# Altium PCB CP2105.PcbDoc
Units mil, origin at the board's own origin, x right, y up, seen from the top; angles counter-clockwise.
Board outline 990 x 600 mil, 2 copper layers (Top Layer, Bottom Layer), stack 65.792 mil thick; 17 components, 27 nets, 91 pads, 31 vias.
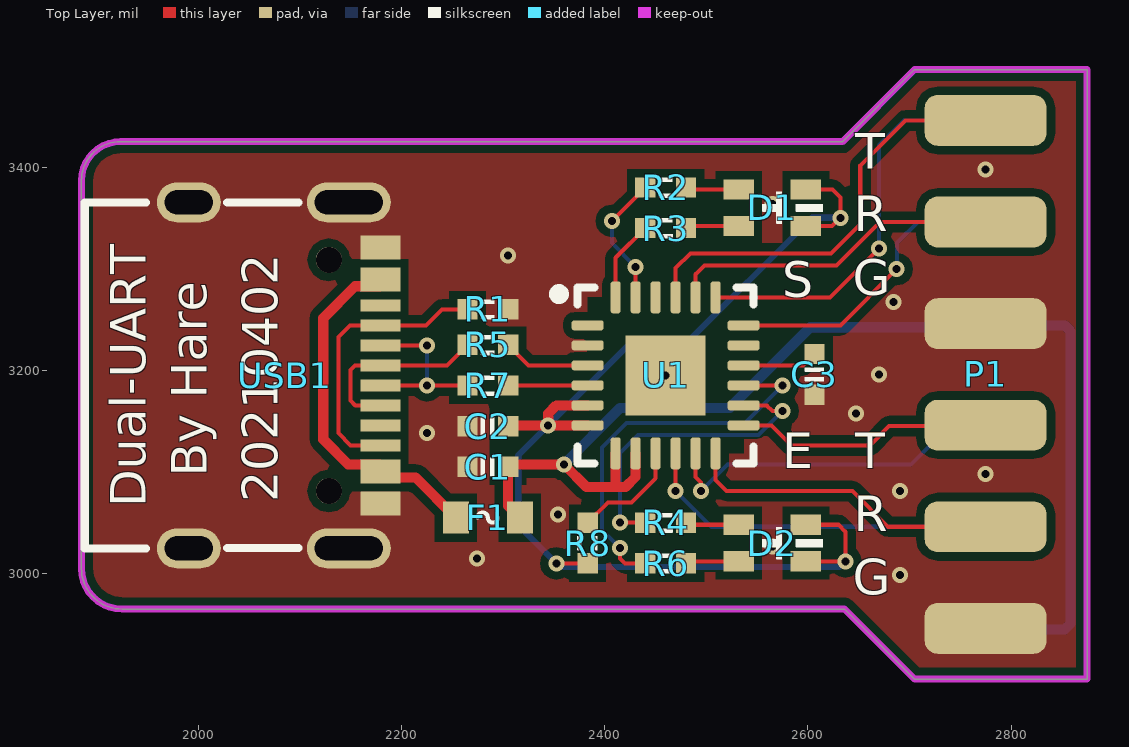
[diagram p0: Top Layer view]
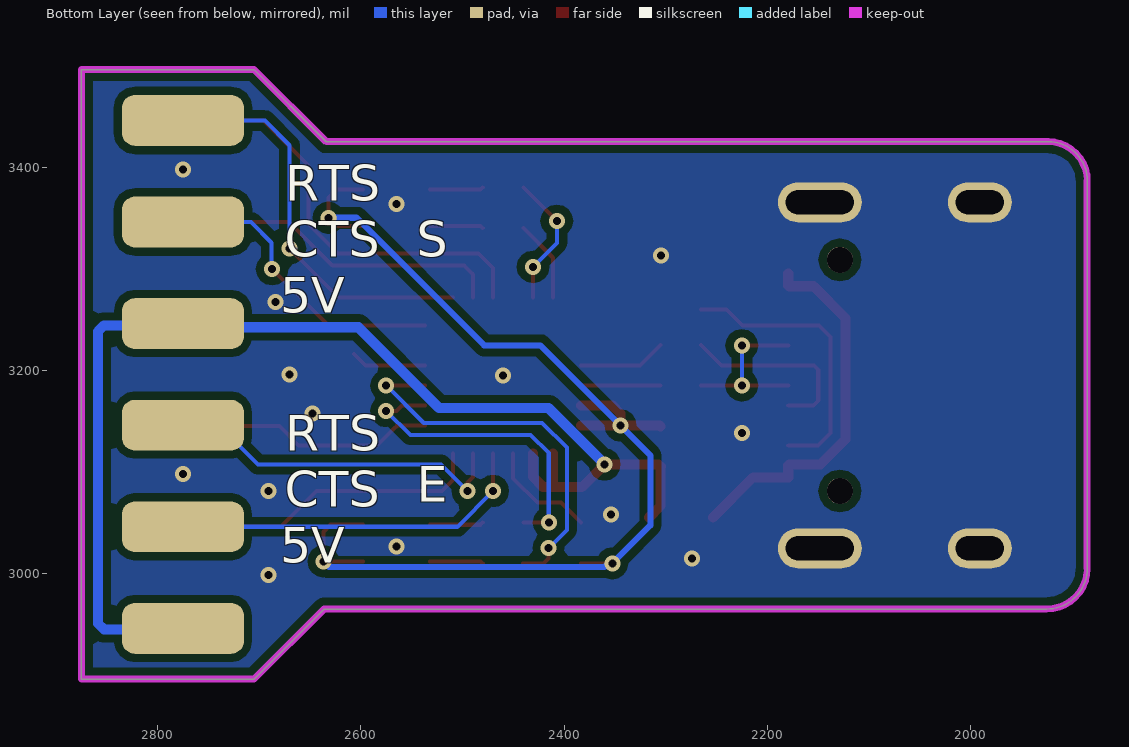
[diagram p1: Bottom Layer view, seen from below]

## Layer stack, top to bottom
Top Solder: solder mask 0.4, Solder Resist, Dk 3.5
Top Layer: signal copper 1.4
Dielectric 1: dielectric 62.9921, FR-4, Dk 4.8
Bottom Layer: signal copper 1.4
Bottom Solder: solder mask 0.4, Solder Resist, Dk 3.5

## Board outline
1925,2965 cw(c1925,3005) 1885,3005 1885,3386.65 cw(c1923.35,3386.65) 1923.35,3425 2634,3425 2705,3496 2875,3496 2875,2896 2705,2896 2636,2965

## Design rules (kind name [scope] priority, off if disabled: settings)
Clearance [All] p1: gap=7.87 ignorepadtopadclearanceinfootprint=TRUE
ComponentClearance [All] p1: gap=0 collisioncheckmode=3 verticalgap=0 showdistances=FALSE
DiffPairsRouting [All] p1: maxlimit=10 minlimit=10 mostfreqgap=10 toplayer_minwidth=7.87 toplayer_maxwidth=15 toplayer_prefwidth=7.87 bottomlayer_minwidth=7.87 bottomlayer_maxwidth=15 bottomlayer_prefwidth=7.87 maxuncoupledlength=500
MatchedLengths SD_CARD_MatchedLengths [InNetClass('SD_CARD')] p1: tolerance=400 checknetsindiffpair=FALSE checkdiffpairvsdiffpair=TRUE checkxsignals=TRUE checkothers=TRUE
PolygonConnect PolygonConnect_wifi [HasFootprint('RTL8723DU_MOUDLE')] p1: connectstyle=Relief reliefconductorwidth=10 reliefentries=4 polygonreliefangle="90 Angle" airgapwidth=10
PolygonConnect PolygonConnect_Res [HasFootprint('RES_0603')] p2: connectstyle=Relief reliefconductorwidth=10 reliefentries=4 polygonreliefangle="90 Angle" airgapwidth=10
PolygonConnect PolygonConnect_Core [HasFootprint('CORE-82PIN-SMD')] p3: connectstyle=Relief reliefconductorwidth=10 reliefentries=4 polygonreliefangle="90 Angle" airgapwidth=10
PolygonConnect [All] p4: connectstyle=Direct reliefconductorwidth=10 reliefentries=4 polygonreliefangle="90 Angle" airgapwidth=10
RoutingVias [All] p1: holewidth=28 width=50 viastyle="Through Hole" minholewidth=7.87 minwidth=15.75 maxholewidth=28 maxwidth=50
SolderMaskExpansion [All] p1: expansion=4
Width Width_PWR [InNetClass('PWR')] p1: maxlimit=23.62 minlimit=7.87 preferedwidth=10
Width [All] p2: maxlimit=23.62 minlimit=4 preferedwidth=8
28 further rules are at their usual default settings.

## Components (designator, comment, footprint, x,y, rotation, side; value= is the part's Value field where it differs from the comment)
C1 "4.7uF" CAP_0402 2285,3105 r180 top
C2 "4.7uF" CAP_0402 2285,3145 r180 top
C3 "4.7uF" CAP_0402 2606.5,3196 r270 top
D1 "=Value" LED_1616 2565,3360 r180 top
D2 "=Value" LED_1616 2565,3030 r180 top
F1 "MF-FSMF050X-2" FUSE_0603 2285,3055 r0 top
P1 "DIP 2x6" HDR2X6_2.54_180H 2775,3446 r0 top
R1 "5.1K" RES_0402 2285,3260 r180 top
R2 "4.7K" RES_0402 2460,3380 r0 top
R3 "1K" RES_0402 2460,3340 r0 top
R4 "4.7K" RES_0402 2460,3050 r0 top
R5 "22R" RES_0402 2285,3225 r180 top
R6 "1K" RES_0402 2460,3010 r0 top
R7 "22R" RES_0402 2285,3185 r180 top
R8 "10K" RES_0402 2383.23,3030 r90 top
U1 "CP2105" QFN-24-4.0X4.0-P0.5 2460,3195 r270 top
USB1 "Type-C" USB-Type-C 2085,3195 r180 top

## Footprints (in the part's own frame and the unit in brackets; to place one, negate y for a bottom-side part, rotate by r counter-clockwise, add the part's x,y. Pads: shape width x height; smd on the part's side, far side on the other; paste and mask are expansions set on the pad)
CAP_0402 [mil]
  rect 20x20 smd: 1(-20,0) 2(20,0)
  silkscreen extent -7,-9 7,9, body extent -20,-10 20,10, height 20
FUSE_0603 [mm]
  rect 0.65x0.8 smd: 1(-0.8,0) 2(0.8,0)
  silkscreen extent -0.25,-0.13 0.25,0.13, body extent -0.8,-0.4 0.8,0.4, height 0.45
HDR2X6_2.54_180H [mil]
  rrect50% 120x50 smd: 1(0,0) 3(0,-100) 5(0,-200) 7(0,-300) 9(0,-400) 11(0,-500)
  rrect50% 120x50 smd far side: 2(0,0) 4(0,-100) 6(0,-200) 8(0,-300) 10(0,-400) 12(0,-500)
  body extent -38,-550 415,50, height 78
LED_1616 [mil]
  rect 30x20 smd: 1(33,-18) 2(33,18) 3(-33,18) 4(-33,-18)
  silkscreen extent -50,-16 10,16, body extent -31,-30 31,30, height 13
QFN-24-4.0X4.0-P0.5 [mm] "QFN, 24-Leads, Body 4.00x4.00mm, Pitch 0.50mm, Thermal Pad 2.70x2.60mm, IPC Medium Density"
  rrect50% 0.25x0.8 smd: 1(-1.25,-1.95) 2(-0.75,-1.95) 3(-0.25,-1.95) 4(0.25,-1.95) 5(0.75,-1.95) 6(1.25,-1.95) 13(1.25,1.95) 14(0.75,1.95) 15(0.25,1.95) 16(-0.25,1.95) 17(-0.75,1.95) 18(-1.25,1.95)
  rrect50% 0.8x0.25 smd: 7(1.95,-1.25) 8(1.95,-0.75) 9(1.95,-0.25) 10(1.95,0.25) 11(1.95,0.75) 12(1.95,1.25) 19(-1.95,1.25) 20(-1.95,0.75) 21(-1.95,0.25) 22(-1.95,-0.25) 23(-1.95,-0.75) 24(-1.95,-1.25)
  rect 2x2 smd: 25(0,0)
  silkscreen extent -2.2,-2.79 2.2,2.2, body extent -2.07,-2.07 2.07,2.07, height 0.9
RES_0402 [mil]
  rect 20x20 smd: 1(-20,0) 2(20,0)
  silkscreen extent -7,-10 7,10, body extent -20,-10 20,10, height 14
USB-Type-C [mm]
  round 0.65 hole 0.65: 0(-1.105,2.89) 0(-1.105,-2.89)
  oval 1.6x1 hole 0.6 slot 1.2 at 0 deg: 1(2.395,4.325) 2(2.395,-4.325)
  oval 2.1x1 hole 0.6 slot 1.7 at 0 deg: 3(-1.605,-4.325) 4(-1.605,4.325)
  rect 1x0.3 smd: A1(-2.395,-3.35) A4(-2.395,-2.55) A5(-2.395,-1.25) A6(-2.395,-0.25) A7(-2.395,0.25) A8(-2.395,1.25) A9(-2.395,2.55) A12(-2.395,3.35) B1(-2.395,3.05) B4(-2.395,2.25) B5(-2.395,1.75) B6(-2.395,0.75) B7(-2.395,-0.75) B8(-2.395,-1.75) B9(-2.395,-2.25) B12(-2.395,-3.05)
  silkscreen extent -0.34,-4.33 4.99,4.33, body extent -2.67,-4.48 5.08,4.48, height 3.26

## Part data
C1 C2 C3: library part CAP, "Capacitor", Specification="X7R 16V"
D1 D2: library part LEDx2, "LED˫ɫ", Value1=Green, Value2=Red
F1: library part Fuse, "Fuse", Specification="6V 0.5A"
P1: library part HDR2x6, "Header", Type=2.54
R1 R2 R3 R4 R5 R6 R7 R8: library part RES, "Resistor", Specification=±1%
U1: "Single-Chip USB to Dual UART Data Transfer"
USB1: library part USB-Type-C

## Via types
v1: diameter 15.75, hole 7.87, Top Layer to Bottom Layer, tented both sides, 31 vias

## Nets (pads, with @x,y where several pads share a name; then routed paths per layer and width w, separated by ;. In a path a pad name is that pad's centre, name@x,y a point inside that pad or via, vN(x,y) a via of type N, cw(c..) or ccw(c..) an arc to the next point about the centre after c; other vN are vias at no path point)
CP_USB_D_N: R7.1 U1.4 | length 78.3
  Top Layer w4: R7.1 2305.16,3185.16 U1.4
CP_USB_D_P: R5.1 U1.3 | length 86.6
  Top Layer w4: R5.1 2325.16,3204.84 U1.3
ECI_CTS: P1.10 U1.10 | length 356.8
  Top Layer w4: v1(2469.84,3081.22) U1.10
  Bottom Layer w4: v1(2469.84,3081.22) 2505.06,3046 P1.10
ECI_RTS: P1.8 U1.11 | length 346.2
  Top Layer w4: U1.11 2489.53,3095 2495,3089.53 v1(2495,3081.22)
  Bottom Layer w4: v1(2495,3081.22) 2495,3081.32 2520.97,3107.29 2701.29,3107.29 2740,3146 P1.8
ECI_RX_LED: R4.1 U1.14 | length 311.2
  Top Layer w4: v1(2415,3050) R4.1 ; U1.14 2559.53,3165.47 2565,3160 v1(2575,3160)
  Bottom Layer w4: v1(2415,3050) 2415,3118.5 2432.78,3136.28 2551.28,3136.28 v1(2575,3160)
ECI_RXD: P1.9 U1.12 | length 311.1
  Top Layer w4: U1.12 2509.21,3092.11 2512.75,3088.57 2512.75,3088.47 2520,3081.22 2643.78,3081.22 2679,3046 P1.9
ECI_TX_LED: R6.1 U1.15 | length 385.2
  Top Layer w4: v1(2415.31,3025) 2415.31,3014.69 2420,3010 R6.1 R6.1@2440.31,3010 ; U1.15 2536.85,3185.08 2574.92,3185.08 v1(2575,3185)
  Bottom Layer w4: v1(2415.31,3025) 2414.9,3025 2397.25,3042.65 2397.25,3123.89 2421.52,3148.15 2538.05,3148.15 2574.9,3185 v1(2575,3185)
ECI_TXD: P1.7 U1.13 | length 254.6
  Top Layer w4: U1.13 2564.11,3145.79 2567.65,3142.25 2567.75,3142.25 2583.9,3126.1 2661.1,3126.1 2680,3145 2774,3145 P1.7
GND: C1.2 C2.2 C3.2 P1.5 P1.11 R1.1 U1.2 U1.25 USB1.1 USB1.2 USB1.3 USB1.4 USB1.A1 USB1.A12 USB1.B1 USB1.B12
  other v1: 2690.64,2998.65 2274.18,3014.69 2565,3026.5 2353.86,3058.07 2690.64,3081.32 2775,3097.72 2225,3138.18 2647.64,3157.42 2460,3195 2670,3196 2684.17,3267.12 2304.69,3312.94 2565,3363.5 2775,3397.87
NetC3_1: C3.1 U1.16 | length 74.3
  Top Layer w4: U1.16 2595.34,3204.84 C3.1
NetD1_1: D1.1 R2.2 | length 52.8
  Top Layer w4: R2.2 2482,3378 D1.1
NetD1_2: D1.2 R3.2 | length 52.8
  Top Layer w4: R3.2 2482,3342 D1.2
NetD2_1: D2.1 R4.2 | length 52.8
  Top Layer w4: R4.2 2482,3048 D2.1
NetD2_2: D2.2 R6.2 | length 52.8
  Top Layer w4: R6.2 2482,3012 D2.2
NetR1_2: R1.2 USB1.A5 USB1.B5 | length 279.5
  Top Layer w4: USB1.B5 2149.93,3126.1 2137.86,3138.18 2137.86,3232.86 2149.21,3244.21 USB1.A5 2224.21,3244.21 2240,3260 R1.2
NetR8_2: R8.2 U1.9 | length 109.5
  Top Layer w4: R8.2 2403.1,3069.87 2426.3,3069.87 2450.16,3093.73 U1.9
SCI_CTS: P1.4 U1.18 | length 295.4
  Top Layer w4: U1.18 2631.98,3244.21 v1(2687.31,3299.55)
  Bottom Layer w4: v1(2687.31,3299.55) 2687.75,3299.98 2687.75,3325.55 2708.2,3346 P1.4
SCI_RTS: P1.2 U1.19 | length 397.4
  Top Layer w4: U1.19 2621.77,3271.77 v1(2670,3320)
  Bottom Layer w4: v1(2670,3320) 2670,3421.51 2694.49,3446 P1.2
SCI_RX_LED: R2.1 U1.23 | length 131.6
  Top Layer w4: v1(2407.08,3347.09) R2.1 ; U1.23 v1(2430.47,3301.85)
  Bottom Layer w4: v1(2407.08,3347.09) 2407.08,3325.24 v1(2430.47,3301.85)
SCI_RXD: P1.3 U1.20 | length 329.5
  Top Layer w4: U1.20 2489.53,3294.53 2498.2,3303.2 2628.11,3303.2 2670.9,3346 P1.3
SCI_TX_LED: R3.1 U1.24 | length 80.3
  Top Layer w4: U1.24 2410.79,3310.79 R3.1
SCI_TXD: P1.1 U1.21 | length 428
  Top Layer w4: U1.21 2469.84,3300.63 2484.29,3315.08 2622.66,3315.08 2651.6,3344.02 2651.6,3401.6 2696,3446 P1.1
USB_D_N: R7.2 USB1.A7 USB1.B7 | length 170.9
  Top Layer w4: USB1.A7 v1(2225,3185.16) 2264.84,3185.16 R7.2 ; USB1.B7 v1(2225,3224.53)
  Bottom Layer w4: v1(2225,3185.16) v1(2225,3224.53)
USB_D_P: R5.2 USB1.A6 USB1.B6 | length 187.2
  Top Layer w4: USB1.B6 2154.53,3165.47 2149.73,3170.27 2149.73,3200.46 2154.12,3204.84 USB1.A6 2244.84,3204.84 R5.2
VBUS_5V: F1.1 USB1.A4 USB1.A9 USB1.B4 USB1.B9 | length 370.2
  Top Layer w10: USB1.A4 USB1.B9 2178.39,3282.68 2154.27,3282.68 2122.98,3251.39 2122.98,3132.02 2147.68,3107.32 2178.39,3107.32 USB1.B4 USB1.A9 2213.9,3094.61 F1.1
VCC_5V: C1.1 F1.2 P1.6 P1.12 U1.7 U1.8 | length 1184.8
  Top Layer w10: C1.1@2304.69,3105 2306.98,3107.29 v1(2360,3107.29) 2382.29,3085 2410.79,3085 ; C1.1 2305,3066.5 F1.2 ; U1.7 2410.79,3085 ; U1.8 2430.39,3118.15 2430.39,3095 2420.39,3085 2410.79,3085
  Bottom Layer w10: v1(2360,3107.29) 2360,3107.67 2415.36,3163.03 2523.16,3163.03 2602.51,3242.38 2771.38,3242.38 P1.6 2776.79,3244.21 2852.82,3244.21 2858.68,3238.35 2858.68,2950.86 2852.82,2945 2776,2945 P1.12
VCC_CP_3V45: C2.1 D1.3 D1.4 D2.3 D2.4 R8.1 U1.5 U1.6 | length 1193.2
  Top Layer w4: v1(2352.48,3010) R8.1 ; D2.3 v1(2636.89,3012) 2636.89,3041.08 2629.97,3048 D2.4 ; D1.3 2623.85,3342 v1(2631.97,3350.12) 2631.97,3370.27 2624.24,3378 D1.4
  Top Layer w10: C2.1 2305.71,3145.71 v1(2344.43,3145.71) ; U1.6 2383.15,3145.71 v1(2344.43,3145.71) ; U1.5 2352.48,3165.47 2344.43,3157.42 v1(2344.43,3145.71)
  Bottom Layer w6: v1(2631.97,3350.12) 2604.09,3350.12 2478.5,3224.53 2423.25,3224.53 v1(2344.43,3145.71) 2315,3116.28 2315,3047.48 v1(2352.48,3010) 2354.48,3012 2360.23,3006.25 2631.14,3006.25 v1(2636.89,3012)
pads on no net: U1.1 U1.17 U1.22 USB1.0 USB1.A8 USB1.B8

## Polygon pours and split planes (outlines as drawn)
GND on Top Layer "NONET_L-01_P-001" (solid, remove dead copper, pour order 2): 1810,3575 1855,3530 2930,3530 2930,2840 2875,2785 2825,2835 1795,2835
no net on Top Layer "NONET_L01_P000" (solid, remove dead copper, pour order 0): -1090.59,-350.01
GND on Bottom Layer "NONET_L-01_P-001" (solid, remove dead copper, pour order 4): 1770,3530 2885,3530 2930,3575 2940,3565 2940,2810 1825,2810 1790,2845

## Keep-outs
Keep-Out Layer:
  the board outline again, w6.89

## Other copper
Top Layer:
  pour cut-out: 2383.37,3271.77 2536.77,3271.77 2536.77,3118.23 2382.58,3118.23

## Silkscreen, mask and mechanical layers (free items; w line width, h text height)
Top Overlay:
  text "T" at 2646.66,3386.57 h60
  text "R" at 2645,3325 h60
  text "G" at 2644.08,3262.25 h60
  text "S" at 2575,3260 h60
  text "By Hare" at 2020,3095 h60 r90
  text "E" at 2575,3091.57 h60
  text "T" at 2646.66,3091.57 h60
  text "20210402" at 2090,3070 h60 r90
  text "Dual-UART" at 1960,3065 h60 r90
  text "R" at 2645,3030 h60
  text "G" at 2644.08,2967.25 h60
Bottom Overlay:
  text "RTS" at 2674.22,3355 h60
  text "S" at 2545,3300 h60
  text "CTS" at 2675,3300 h60
  text "5V" at 2679.52,3245 h60
  text "RTS" at 2674.22,3109 h60
  text "E" at 2545,3059 h60
  text "CTS" at 2675,3054 h60
  text "5V" at 2679.52,2999 h60
Mechanical 1:
  the board outline again, w6.89
Top Component:
  lines w6.89: 1885,3196 2880,3196